# EAGLE board with sensor  (EAGLE 9.7.0)

Size 154.2 x 91.49 mm. Coordinates in mm from the lower left corner, seen from the top.
Outline: 0,0 154.2,0 154.2,91.49 0,91.49 0,0
Copper layers (1*16): Top 0.035mm / dielectric 1.5mm / Bottom 0.035mm
Design rules "default": minimum track width 6mil, minimum drill 0.35mm, track to track 6mil, track to pad 6mil, pad to pad 6mil, via to via 6mil, smd to smd 6mil, copper to edge 40mil, drill to drill 6mil, minimum pad ring 10mil, minimum via ring 8mil, stop-mask expansion 4mil, vias tented up to drill 0mil, thermal gap 10mil

## Footprints (pad centres in the part's own frame; a part is rotated, then mirrored left to right if it is on the bottom)
CAPPRD254W65D500H1150B = drill 0.85 pad 1.45: 1 -1.27,0; 2 1.27,0
LEDRD254W60D565H860B = drill 0.981 pad 1.581: 1 -1.27,0; 2 1.27,0
28027 = drill 1.016 long: 1 -2.54,0; 2 0,0; 3 2.54,0
RESAD1016W63L850D250B = drill 0.83 pad 1.43: 1 -5.08,0; 2 5.08,0
SWITCH-MOMENTARY-PTH-6.5MM = drill 1.016 pad 1.88: 1 -3.251,2.261; 2 3.251,2.261; 3 -3.251,-2.261; 4 3.251,-2.261
TO220BV = drill 1.016 long: D 0,-2.54; G -2.54,-2.54; S 2.54,-2.54
ARDUINO-UNO-R3-SHIELD = drill 1.016 pad 1.88: 3.3V 24.13,-2.54; 5V 24.13,0; A0 24.13,12.7; A1 24.13,15.24; A2 24.13,17.78; A3 24.13,20.32; A4 24.13,22.86; A5 24.13,25.4; AREF -24.13,-13.97; D2 -24.13,20.32; D3 -24.13,17.78; D4 -24.13,15.24; D5 -24.13,12.7; D6 -24.13,10.16; D7 -24.13,7.62; D8 -24.13,3.81; D9 -24.13,1.27; D10 -24.13,-1.27; D11 -24.13,-3.81; D12 -24.13,-6.35; D13 -24.13,-8.89; GND@0 24.13,2.54; GND@1 24.13,5.08; GND@2 -24.13,-11.43; IOREF 24.13,-7.62; NC 24.13,-10.16; RES 24.13,-5.08; RX -24.13,25.4; SCL -24.13,-19.05; SDA -24.13,-16.51; TX -24.13,22.86; VIN 24.13,7.62

## Placement (x,y rotation side)
C2  100u  [CAPPRD254W65D500H1150B]  114.75,40.9 180 top
D1  RED  [LEDRD254W60D565H860B]  138.88,23.12 180 top
PIR1  PIR-SENSOR_28027  [28027]  99.13,85.14 0 top
R1  1k  [RESAD1016W63L850D250B]  119.83,20.58 0 top
R2  10k  [RESAD1016W63L850D250B]  107.13,23.12 180 top
R3  220  [RESAD1016W63L850D250B]  145.23,20.58 0 top
S1  SWITCH_MOMENTARY  [SWITCH-MOMENTARY-PTH-6.5MM]  99.51,29.47 90 top
T1  NMOSFET  [TO220BV]  127.45,25.66 0 top
U1  ARDUINO-UNO-R3-SHIELD  [ARDUINO-UNO-R3-SHIELD]  47.88,29.84 270 top

## Library data of the parts
C2 PIR1 R1-R3 S1 U1 = Tinkercad
D1 = Tinkercad; CATEGORY: Opto-Electronic; SUB-CATEGORY: LED; VALUE: LED_RED
T1 = Tinkercad; CATEGORY: Transistor; SUB-CATEGORY: MOSFET; TYPE: N-Channel

## Nets
D1_A: D1.1 R3.1
D1_C: D1.2 T1.D
T1_G: C2.1 R1.2 T1.G
U1_5V: PIR1.2 R3.2 S1.1 S1.2 U1.5V
U1_A0: PIR1.1 U1.A0
U1_D2: R2.2 S1.3 S1.4 U1.D2
U1_D3: R1.1 U1.D3
U1_GND: C2.2 PIR1.3 R2.1 T1.S U1.GND@0 U1.GND@1 U1.GND@2

## Tracks (layer width: path | path; a pad name or v marks a point on that pad's centre or on a via)
D1_A  (1 unrouted)
D1_C  (1 unrouted)
T1_G  (2 unrouted)
U1_5V  (4 unrouted)
U1_A0  (1 unrouted)
U1_D2  (3 unrouted)
U1_D3  (1 unrouted)
U1_GND  (6 unrouted)